# Altium PCB PCBVerstuur.pcbdoc (part 1 of 2)
Units mil, origin at the board's own origin, x right, y up, seen from the top; angles counter-clockwise.
Board outline 6000 x 4000 mil, 2 copper layers (Top Layer, Bottom Layer); 76 components, 71 nets, 294 pads, 53 vias.
Unrouted connection lines stored in the file: 2.
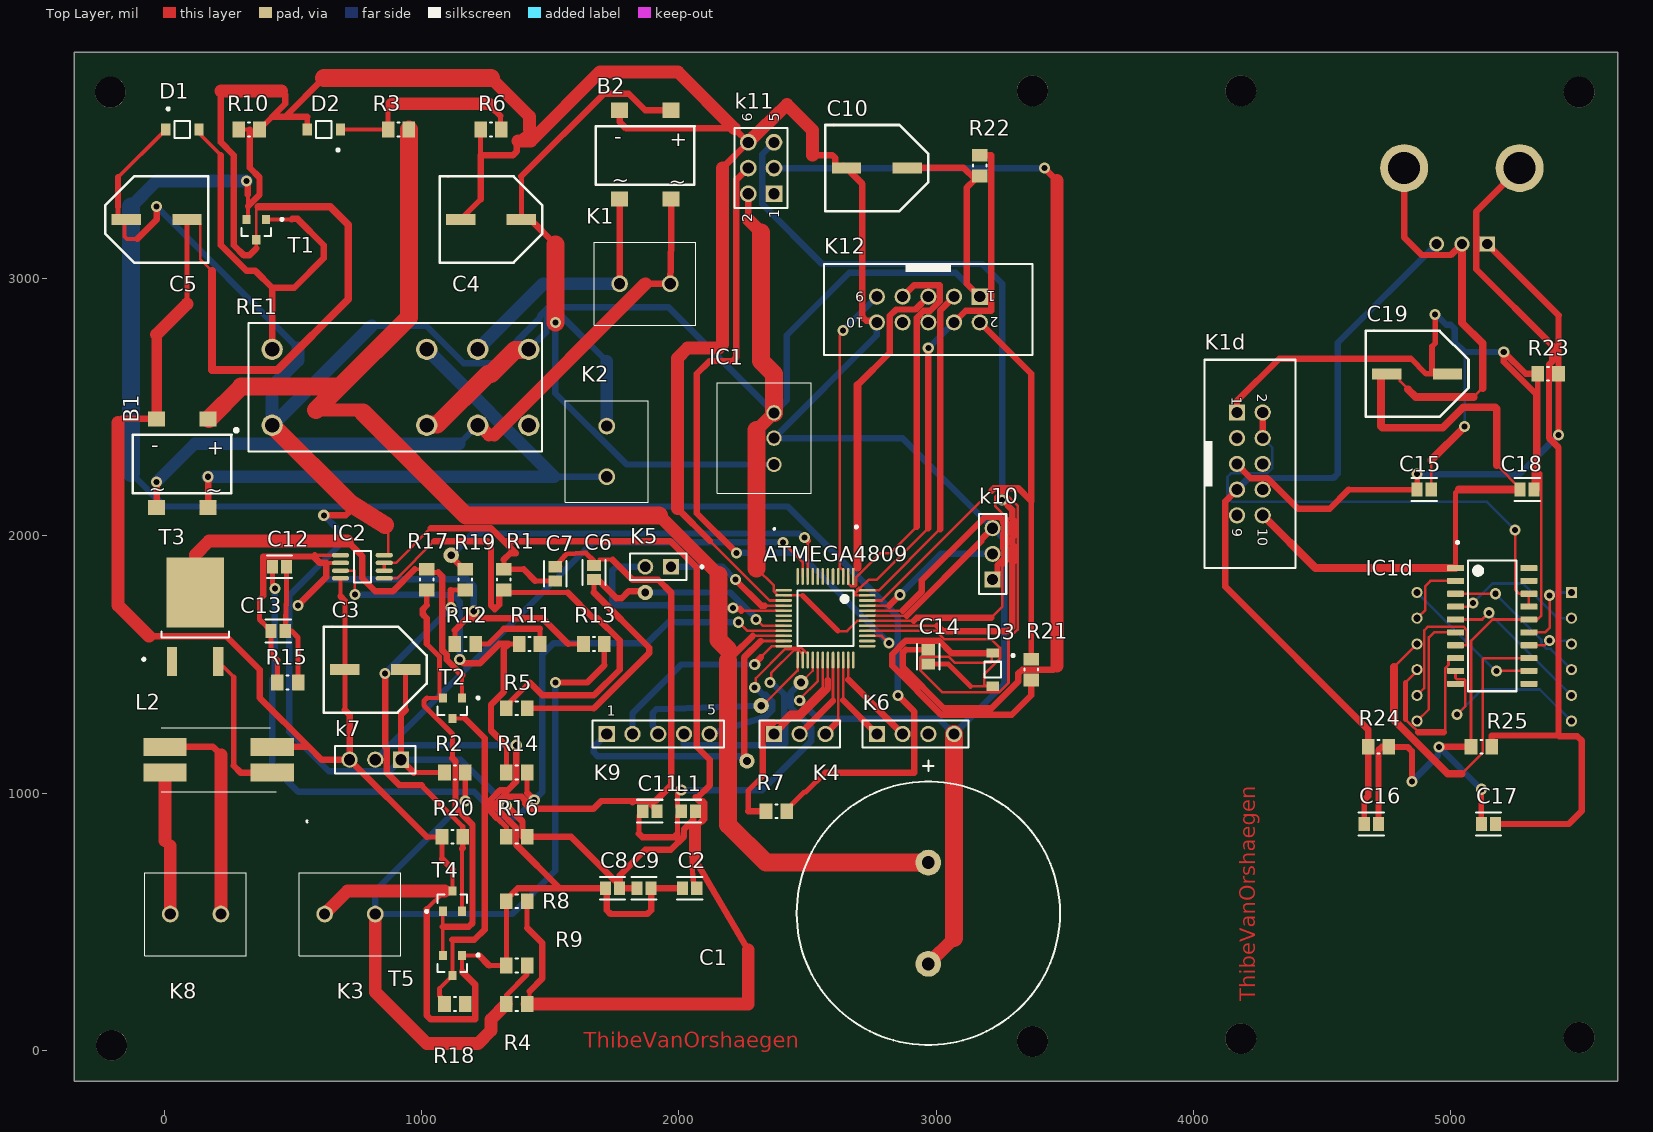
[diagram p0: Top Layer view]
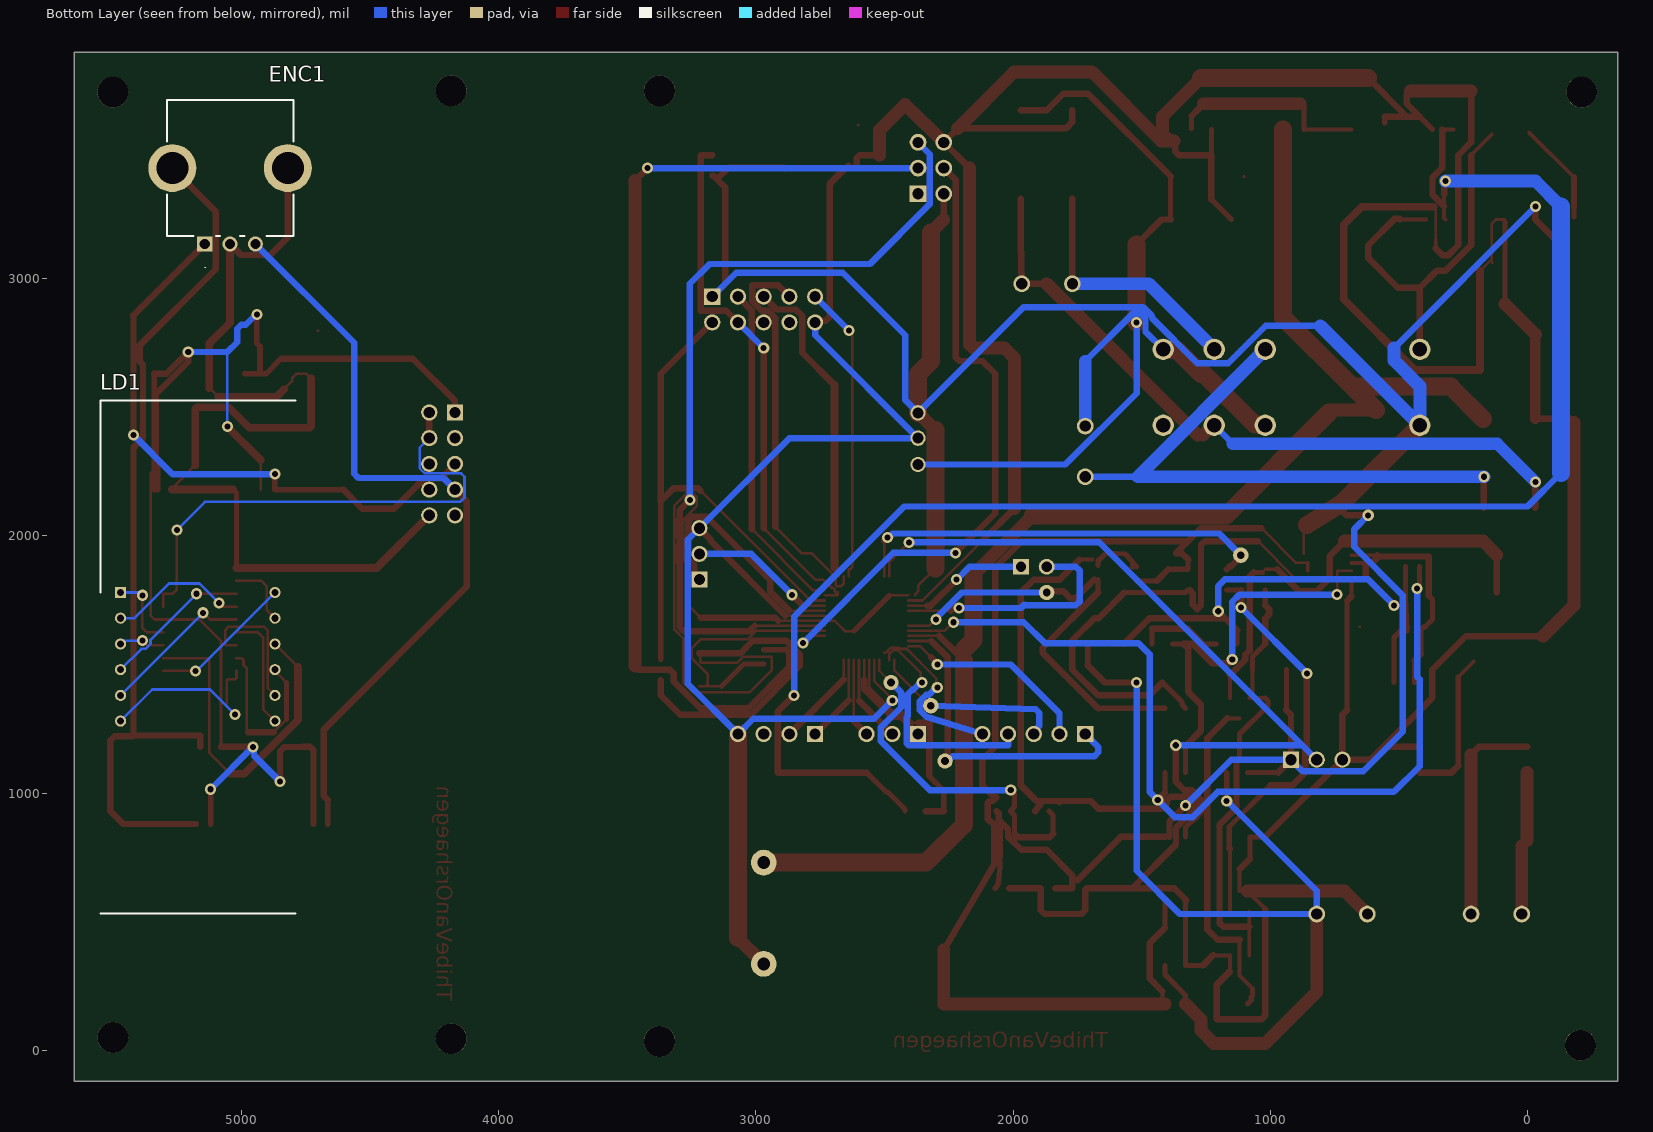
[diagram p1: Bottom Layer view, seen from below]

## Layer stack, top to bottom
Top Solder: solder mask 0.4, Solder Resist, Dk 3.5
Top Layer: signal copper 1.4
Dielectric 1: dielectric 12.6, FR-4, Dk 4.8
Bottom Layer: signal copper 1.4
Bottom Solder: solder mask 0.4, Solder Resist, Dk 3.5

## Board outline
-350,-120 5650,-120 5650,3880 -350,3880

## Design rules (kind name [scope] priority, off if disabled: settings)
Clearance [All] p1: gap=0.25 ignorepadtopadclearanceinfootprint=FALSE
HoleSize [All] p1: absolutevalues=TRUE maxlimit=130 minlimit=1 maxpercent=80.000 minpercent=20.000
MinimumSolderMaskSliver [All] p1: minsoldermaskwidth=5
PolygonConnect [All] p1: connectstyle=Relief reliefconductorwidth=10 reliefentries=4 polygonreliefangle="90 Angle" airgapwidth=10
RoomDefinition Voeding [InComponentClass('Voeding')] p1: confinementstyle=ConfineOut formatcopy=TRUE lockcomponents=FALSE outline -1350,-1120 650,-1120 650,-120 -1350,-120
RoomDefinition Thermokoppel [InComponentClass('Thermokoppel')] p2: confinementstyle=ConfineOut formatcopy=TRUE lockcomponents=FALSE outline -1350,-1120 650,-1120 650,-120 -1350,-120
RoomDefinition PWM_Soldeerbout [InComponentClass('PWM_Soldeerbout')] p3: confinementstyle=ConfineOut formatcopy=TRUE lockcomponents=FALSE outline -1350,-1120 650,-1120 650,-120 -1350,-120
RoomDefinition Display [InComponentClass('Display')] p4: confinementstyle=ConfineOut formatcopy=TRUE lockcomponents=FALSE outline -1350,-1120 650,-1120 650,-120 -1350,-120
RoomDefinition CPU_microcontroler [InComponentClass('CPU_microcontroler')] p5: confinementstyle=ConfineOut formatcopy=TRUE lockcomponents=FALSE outline -1350,-1120 650,-1120 650,-120 -1350,-120
RoutingVias [All] p1: holewidth=23.62 width=43.31 viastyle="Through Hole" minholewidth=23.62 minwidth=43.31 maxholewidth=23.62 maxwidth=43.31
SilkToSolderMaskClearance [IsPad] p1: minsilkscreentomaskgap=0 clearancetoexposedcopper=TRUE
SolderMaskExpansion [All] p1: expansion=4 istentingtop=FALSE
Width [All] p1: maxlimit=70 minlimit=10 preferedwidth=10 minimp=50.000000 maximp=50.000000 favimp=50.000000
27 further rules are at their usual default settings.

## Classes and differential pairs
component class Voeding: B1 B2 C1 C4 C5 D1 D2 IC1 K1 K2 R3 R6 R7 R10 RE1 T1
component class Thermokoppel: C2 C3 C6 C7 C12 C13 IC2 K3 R1 R2 R4 R5 R8 R9 R11 R12 R13 R14 R15
component class PWM_Soldeerbout: K8 L2 R17 R18 R19 R20 T2 T3 T4 T5
component class Display: C15 C16 C17 C18 C19 ENC1 IC1d K1d LD1 R23 R24 R25
component class CPU_microcontroler: ATMEGA4809 C8 C9 C10 C11 C14 D3 K4 K5 K6 k7 K9 k10 k11 K12 L1 R16 R21 R22

## Components (designator, comment, footprint, x,y, rotation, side; value= is the part's Value field where it differs from the comment)
ATMEGA4809 "ATMEGA4809" TQFP_48_M 2570,1680 r270 top
B1 "D6KB6U" TTF 70,2280 r0 top
B2 "D6KB6U" TTF 1870,3480 r0 top
C1 "4700µ 50v" CE_D25_L25_PLUGIN 2970,336.3 r90 top
C2 "10µ 50v" CC_0805_M 2042.41,630 r180 top value="0.22 μF"
C3 "100n" CE_D8_L10 820,1480 r0 top
C4 "100µ 25V" CE_D8_L10 1270,3230 r0 top
C5 "10µ 50V" CE_D8_L10 -30,3230 r180 top
C6 "10n" CC_0805_M 1670,1857.59 r90 top value="0.22 μF"
C7 "10n" CC_0805_M 1520,1852.41 r90 top value="0.22 μF"
C8 "100nf" CC_0805_M 1742.41,630 r180 top value="0.22 μF"
C9 "100nf" CC_0805_M 1864.82,630 r0 top value="0.22 μF"
C10 "10µf" CE_D8_L10 2770,3430 r0 top
C11 "100nf" CC_0805_M 1887.23,930 r0 top value="0.22 μF"
C12 "10n" CC_0805_M 447.59,1880 r0 top value="0.22 μF"
C13 "10n" CC_0805_M 442.41,1630 r0 top value="0.22 μF"
C14 "100n" CC_0805_M 2970,1530 r90 top value="0.22 μF"
C15 "10n" CC_0805_M 4897.59,2180 r180 top value="0.22 μF"
C16 "10n" CC_0805_M 4692.41,880 r180 top value="0.22 μF"
C17 "10n" CC_0805_M 5147.59,880 r0 top value="0.22 μF"
C18 "100n" CC_0805_M 5297.59,2180 r180 top value="0.22 μF"
C19 "100µ" CE_D8_L10 4870,2630 r0 top
D1 "1N4007" SOD-123FL 70,3580 r0 top value=15pF
D2 "5v1" SOD-123FL 620,3580 r180 top
D3 "Diode" SOD-123FL 3220,1480 r270 top value=15pF
ENC1 "ROTARY_ENCODER" PEC11R4225FN0024 5142.83,3134.72 r180 bottom
IC1 "OKI-78SR-5/1.5-W36-C" OKI78SR515W36C 2370,2277.64 r90 top
IC1d "TM1637" SOP_20_M 5162.28,1650 r0 top
IC2 "" MSOP_8_M 770,1880 r180 top
K1 "282836-2" "SCHROEFCONNECTOR 2 PIN" 1770,2980 r180 top
K1d "61201021621" "BOX HEADER 10-PIN" 4220,2280 r270 top
K2 "282836-2" "SCHROEFCONNECTOR 2 PIN" 1720,2426.85 r90 top
K3 "282836-2" "SCHROEFCONNECTOR 2 PIN" 820,530 r0 top
K4 "61300311121" "PIN HEADER 1X3" 2470,1230 r0 top
K5 "M20-9990246" "PIN HEADER 1X2" 1920,1880 r180 top
K6 "61300411121" "PIN HEADER 1X4" 2920,1230 r0 top
k7 "61300311121" "PIN HEADER 1X3" 820,1130 r180 top
K8 "" "SCHROEFCONNECTOR 2 PIN" 220,530 r0 top
K9 "61300511121" "PIN HEADER 1X5" 1920,1230 r0 top
k10 "61300311121" "PIN HEADER 1X3" 3220,1930 r90 top
k11 "61300621121" "PIN HEADER 2X6" 2320,3430 r90 top
K12 "" "BOX HEADER 10-PIN" 2970,2880 r180 top
L1 "Choke" CC_0805_M 2037.23,930 r0 top
L2 "" 2545 211.14,1130 r90 top
LD1 "7 Sigment" DIPS1524W51P254L5040H825Q12N 5470,1780 r180 bottom
R1 "18k" RESC2013X50X30ML20T20 1320,1830 r90 top
R2 "1M" RESC2013X50X30ML20T20 1129.65,1080 r180 top
R3 "68k" RESC2013X50X30ML20T20 910.35,3580 r0 top
R4 "5K6" RESC2013X50X30ML20T20 1370,180 r180 top
R5 "5K6" RESC2013X50X30ML20T20 1370,1330 r180 top
R6 "10k" RESC2013X50X30ML20T20 1270,3580 r0 top
R7 "10k" RESC2013X50X30ML20T20 2379.65,930 r0 top
R8 "1k" RESC2013X50X30ML20T20 1370,580 r0 top
R9 "10M" RESC2013X50X30ML20T20 1370,330 r0 top
R10 "4k7" RESC2013X50X30ML20T20 329.65,3580 r180 top
R11 "18k" RESC2013X50X30ML20T20 1420,1580 r0 top
R12 "18k" RESC2013X50X30ML20T20 1170,1580 r180 top
R13 "5K6" RESC2013X50X30ML20T20 1670,1580 r0 top
R14 "5K6" RESC2013X50X30ML20T20 1370,1080 r180 top
R15 "100" RESC2013X50X30ML20T20 479.65,1430 r180 top
R16 "47k" RESC2013X50X30ML20T20 1370,830 r180 top
R17 "4K7" RESC2013X50X30ML20T20 1020,1830 r90 top
R18 "100" RESC2013X50X30ML20T20 1129.65,180 r0 top
R19 "10k" RESC2013X50X30ML20T20 1170,1830 r270 top
R20 "4K7" RESC2013X50X30ML20T20 1120,830 r0 top
R21 "47k" RESC2013X50X30ML20T20 3370,1480 r90 top
R22 "47k" RESC2013X50X30ML20T20 3170,3439.65 r90 top
R23 "10k" RESC2013X50X30ML20T20 5379.65,2630 r180 top
R24 "10k" RESC2013X50X30ML20T20 4720,1180 r0 top
R25 "10k" RESC2013X50X30ML20T20 5120,1180 r180 top
RE1 "" RT42 419.21,2577.64 r0 top
T1 "BC547" SOT_23 357.4,3190.63 r270 top
T2 "BC547" SOT_23 1120,1330 r270 top
T3 "IRF9Z34NPBF" TO_252 120,1685.51 r90 top
T4 "BC547" SOT_23 1120,580 r90 top
T5 "BC557" SOT_23 1120,330 r270 top

## Footprints (in the part's own frame and the unit in brackets; to place one, negate y for a bottom-side part, rotate by r counter-clockwise, add the part's x,y. Pads: shape width x height; smd on the part's side, far side on the other; paste and mask are expansions set on the pad)
2545 [mm]
  rect 1.78x4.27 smd: 1(-1.27,-5.305) 2(1.27,-5.305) 3(1.27,5.305) 4(-1.27,5.305)
  silkscreen extent -6.2,-8.76 3.15,5.69, body extent -3.15,-7.26 3.15,7.26, height 9.6
"BOX HEADER 10-PIN" [mm] "10 pins, straight, gold plating"
  rect 1.6x1.6 hole 1.1: 1(-5.08,-1.27)
  round 1.6 hole 1.1: 2(-5.08,1.27) 3(-2.54,-1.27) 4(-2.54,1.27) 5(0,-1.27) 6(0,1.27) 7(2.54,-1.27) 8(2.54,1.27) 9(5.08,-1.27) 10(5.08,1.27)
  silkscreen extent -10.28,-4.5 10.28,4.5, body extent -10.18,-4.42 10.18,4.75, height 9.13
CC_0805_M [mil]
  rect 43.49x53.39 smd paste+0 mask+0: 1(-27.59,0) 2(27.59,0)
  silkscreen extent -49,-44 49,44, body extent -53,-32 53,32, height 10
CE_D8_L10 [mm]
  rect 2.9x1.1 smd: 1(-3,0) 2(3,0)
  Top Layer lines w0.254: -4.259,4.25 -4.25,4.241
  silkscreen extent -5.08,-4.25 5.08,4.25
CE_D25_L25_PLUGIN [mm]
  round 2.54 hole 1.27: 1(0,0) 2(10,0)
  silkscreen extent -8,-13 20.07,13
DIPS1524W51P254L5040H825Q12N [mm]
  rect 1.1x1.1 hole 0.7: 1(0,0)
  round 1.1 hole 0.7: 2(0,-2.54) 3(0,-5.08) 4(0,-7.62) 5(0,-10.16) 6(0,-12.7) 7(15.24,-12.7) 8(15.24,-10.16) 9(15.24,-7.62) 10(15.24,-5.08) 11(15.24,-2.54) 12(15.24,0)
  silkscreen extent -2.01,-31.68 17.24,18.98
MSOP_8_M [mil] "TSOP, 8-Leads, Body 3x3mm, Pitch 0.65mm, IPC Medium Density"
  oval 66.93x17.72 smd: 1(-85,45) 2(-85,15) 3(-85,-15) 4(-85,-45) 5(85,-45) 6(85,-15) 7(85,15) 8(85,45)
  silkscreen extent -33,-61 33,61, body extent -61,-61 61,61, height 43
OKI78SR515W36C [mm]
  round 1.519 hole 1.08: 1(0,0) 2(2.6,0) 3(5.1,0)
  silkscreen extent -6.4,-3.7 8.05,5.6, body extent -2.85,-3.7 8.05,5.6, height 16.6
PEC11R4225FN0024 [mm]
  round 4.74 hole 3.16: 1(-3.2,7.5) 2(8.2,7.5)
  rect 1.5x1.5 hole 1: A(0,0)
  round 1.5 hole 1: B(5,0) C(2.5,0)
  silkscreen extent -3.75,-2.34 8.75,14.2, body extent -4.68,-0.4 9.68,14.2, height 31.6
"PIN HEADER 1X2" [mm]
  rect 1.57x1.57 hole 1.02 paste-1000 mask+0: 1(-1.27,0)
  round 1.57 hole 1.02 paste-1000 mask+0: 2(1.27,0)
  silkscreen extent -4.44,-1.32 2.79,1.32, body extent -2.89,-1.42 2.89,1.42, height 0.25
"PIN HEADER 1X3" [mm] "Pin Header, pitch 2.54 mm, THT, Vertical, single row, 3p"
  rect 1.6x1.6 hole 1.1: 1(-2.54,0)
  round 1.6 hole 1.1: 2(0,0) 3(2.54,0)
  silkscreen extent -3.96,-1.34 3.96,1.34, body extent -3.81,-1.27 3.81,1.27, height 8.57
"PIN HEADER 1X4" [mm] "Pin Header, pitch 2.54 mm, THT, Vertical, single row, 4p"
  rect 1.6x1.6 hole 1.1: 1(-3.81,0)
  round 1.6 hole 1.1: 2(-1.27,0) 3(1.27,0) 4(3.81,0)
  silkscreen extent -5.23,-1.34 5.23,1.34, body extent -5.08,-1.27 5.08,1.27, height 8.57
"PIN HEADER 1X5" [mm] "Pin Header, pitch 2.54 mm, THT, Vertical, single row, 5p"
  rect 1.6x1.6 hole 1.1: 1(-5.08,0)
  round 1.6 hole 1.1: 2(-2.54,0) 3(0,0) 4(2.54,0) 5(5.08,0)
  silkscreen extent -6.5,-1.34 6.5,1.34, body extent -6.35,-1.27 6.35,1.27, height 8.57
"PIN HEADER 2X6" [mm] "Pin Header, pitch 2.54 mm, THT, Vertical, dual row, 6p"
  rect 1.65x1.65 hole 1.1: 1(-2.54,-1.27)
  round 1.65 hole 1.1: 2(-2.54,1.27) 3(0,-1.27) 4(0,1.27) 5(2.54,-1.27) 6(2.54,1.27)
  silkscreen extent -3.96,-2.61 3.96,2.61, body extent -3.81,-2.54 3.81,2.54, height 8.59
RESC2013X50X30ML20T20 [mm] "Chip Resistor, 2-Leads, Body 2.00x1.25mm, IPC Low Density"
  rect 1.25x1.55 smd: 1(-1.025,0) 2(1.025,0)
  silkscreen extent -0.1,-0.67 0.1,0.67, body extent -1.1,-0.72 1.1,0.72, height 0.5
RT42 [mm]
  round 2.1 hole 1.4: 11(20.3,-3.75) 12(15.26,-3.75) 14(25.34,-3.75) 21(20.3,3.75) 22(15.26,3.75) 24(25.34,3.75) A1(0,-3.75) A2(0,3.75)
  silkscreen extent -3.67,-6.35 26.65,6.35, body extent -2.21,-6.35 26.79,6.35, height 15.86
"SCHROEFCONNECTOR 2 PIN" [mm]
  round 1.65 hole 1.1: 1(0,0) 2(-5,0)
  silkscreen extent -7.5,-4.1 2.5,4.1, body extent -8.09,-4.1 2.51,4.1, height 10.02
SOD-123FL [mm] "SOD, 2-Leads, Body 2.7x1.65mm"
  rect 0.91x1.22 smd: 1(-1.635,0) 2(1.635,0)
  silkscreen extent -1.52,-0.82 0.78,2.16, body extent -1.35,-0.82 1.35,0.82, height 1
SOP_20_M [mm] "SOIC,20-Leads,Body 12.9x5.6mm,Pitch 1.27mm,IPC Medium Density"
  rrect17% 1.65x0.6 smd: 1(-3.625,5.715) 2(-3.625,4.445) 3(-3.625,3.175) 4(-3.625,1.905) 5(-3.625,0.635) 6(-3.625,-0.635) 7(-3.625,-1.905) 8(-3.625,-3.175) 9(-3.625,-4.445) 10(-3.625,-5.715) 11(3.625,-5.715) 12(3.625,-4.445) 13(3.625,-3.175) 14(3.625,-1.905) 15(3.625,-0.635) 16(3.625,0.635) 17(3.625,1.905) 18(3.625,3.175) 19(3.625,4.445) 20(3.625,5.715)
  silkscreen extent -3.55,-6.45 2.4,8.38, body extent -2.8,-6.45 2.8,6.45, height 2
SOT_23 [mm] "SOT23, 3-Leads, Body 2.92x1.3mm, Pitch 0.95mm"
  rect 0.9x0.8 smd: 1(-1,0.95) 2(-1,-0.95) 3(1,0)
  silkscreen extent -1.14,-1.46 0.65,2.67, body extent -0.65,-1.46 0.65,1.46, height 1.11
TO_252 [mm] "DPAK, 3-Leads, Body 6.5x6.12mm, Pitch 2.28mm, IPC Low Density"
  rect 2.85x1 smd: 1(-4.4,2.28) 3(-4.4,-2.28)
  rect 6.9x5.65 smd: 2(2.4,0)
  silkscreen extent -4.32,-3.35 -1.45,5.2, body extent -2.05,-3.32 4.17,3.32, height 2.35
TQFP_48_M [mm]
  rect 1.655x0.252 smd paste+0 mask+0: 1(-4.125,2.75)
  rrect100% 1.655x0.252 smd paste+0 mask+0: 2(-4.125,2.25) 3(-4.125,1.75) 4(-4.125,1.25) 5(-4.125,0.75) 6(-4.125,0.25) 7(-4.125,-0.25) 8(-4.125,-0.75) 9(-4.125,-1.25) 10(-4.125,-1.75) 11(-4.125,-2.25) 12(-4.125,-2.75) 25(4.125,-2.75) 26(4.125,-2.25) 27(4.125,-1.75) 28(4.125,-1.25) 29(4.125,-0.75) 30(4.125,-0.25) 31(4.125,0.25) 32(4.125,0.75) 33(4.125,1.25) 34(4.125,1.75) 35(4.125,2.25) 36(4.125,2.75)
  rrect100% 0.252x1.655 smd paste+0 mask+0: 13(-2.75,-4.125) 14(-2.25,-4.125) 15(-1.75,-4.125) 16(-1.25,-4.125) 17(-0.75,-4.125) 18(-0.25,-4.125) 19(0.25,-4.125) 20(0.75,-4.125) 21(1.25,-4.125) 22(1.75,-4.125) 23(2.25,-4.125) 24(2.75,-4.125) 37(2.75,4.125) 38(2.25,4.125) 39(1.75,4.125) 40(1.25,4.125) 41(0.75,4.125) 42(0.25,4.125) 43(-0.25,4.125) 44(-0.75,4.125) 45(-1.25,4.125) 46(-1.75,4.125) 47(-2.25,4.125) 48(-2.75,4.125)
  silkscreen extent -9.14,-2.75 2.75,3.17, body extent -5.2,-5.2 5.2,5.2, height 0.25
TTF [mm]
  rect 1.7x1.5 smd: 1(2.54,4.445) 2(-2.54,4.445) 3(-2.54,-4.318) 4(2.54,-4.318)
  silkscreen extent -4.91,-2.92 4.86,2.88

## Part data
ATMEGA4809: Case/Package=TQFP, Max Operating Temperature=85°C, Min Operating Temperature=-40°C, Core Architecture=AVR, Interface=I2C, Memory Size=48KB, Memory Type=FLASH, Mount="Surface Mount", Number of I/Os=41, Oscillator Type=Internal, Peripherals="Brown-out Detect/Reset", RoHS Compliant=Yes, Series="megaAVR® 0, Functional Safety (FuSa)"
B1 B2: library part Bridge_Rectifier, Average Rectified Current-Max=0.8A, Forward Voltage=1V, Manufacturer="Diodes Inc", Package Description="4-Pin Small Outline Integrated Circuit, Body 4.7 x 3.8 mm, Pitch 2.5 mm", Package Reference=MiniDIP-4, Package Version=05/2016, Peak Current-Max=30A, Reverse Current-Max=5µA, Reverse Voltage-Max [Vrrm]=600V, Datasheet URL=http://www.diodes.com/_files/datasheets/ds17003.pdf, Datasheet Version="Rev. 13-2, 12/2010", Manufacturer URL=http://www.diodes.com/, Mounting Technology=SurfaceMount, Package URL=http://www.diodes.com/_files/packages/MiniDIP.pdf
C1 C3 C4 C5 C10 C19: library part Capacitor_Electrolytic, Manufacturer=Panasonic, Max Operating Temperature="105 degC", Min Operating Temperature="-55 degC", Package Quantity=500, Voltage Rating="25 V", ComponentLink1Description="Manufacturer URL", ComponentLink1URL=http://www.panasonic.com/, ComponentLink2Description=Datasheet, ComponentLink2URL=http://industrial.panasonic.com/cdbs/www-data/pdf/RDE0000/ABA0000C1181.pdf, DatasheetVersion=03/2016, Height="10.2 mm", Lead Pitch="3.1 mm", Length="10.2 mm", Mount="Surface Mount", Mounting Technology="Surface Mount", PackageDescription="2-Pin Electrolytic Aluminum Capacitor, Body 8.3 x 8.3 mm", PackageReference=EEE-FK1E221P, Packaging="Tape and Reel", Pins=2, REACH SVHC="No SVHC", RoHSCompliant=true
C2 C6 C7 C8 C9 C11 C12 C13 C14 C15 C16 C17 C18: library part Capacitor_Ceramic, Capacitance="0.22 μF", Manufacturer=KEMET, Manufacturer Part Number=C0805C224K5RACTU, Package=C0805C-DN, Temperature="-55°C to +125°C", Temperature Characteristic=X7R, Temperature Coefficient=30ppm/°C, Temperature Range High=+125°C, Temperature Range Low=-55°C, Tolerance=0.1, Voltage Rating="50 V", Automotive=No, Category=Cap, ComponentLink2Description=Datasheet, ComponentLink2URL=https://content.kemet.com/datasheets/KEM_C1003_C0G_SMD.pdf, Device Class L1="Passive Components", Device Class L2=Capacitors, Device Class L3="Ceramic Capacitors", Digikey Description="CAP CER 0.22UF 50V X7R 0805", Height=0.88mm, Ipc Land Pattern Name=CAPC200125X78, Lead Free=Yes, Material=Ceramic, Mouser Description="CAP CER 0.22UF 50V X7R 0805", Octopart=https://octopart.com/c0805c224k5ractu-kemet-144670, RoHS=TRUE
D1: library part Diode, Capacitance=15pF, Forward Current=1A, Manufacturer=Diotec, Max Junction Temp=+175°C, Max Repetitive Reverse Voltage=1000V, Max Surge Forward Current=27A, Peak Reverse Current=5uA, Temperature="-50°C to +175°C", Temperature Range Low=-50°C, Automotive=No, Category=Diode, ComponentLink2Description=Datasheet, ComponentLink2URL=https://datasheet.octopart.com/1N4007-Diotec-datasheet-62346875.pdf, Device Class L1="Discrete Semiconductors", Device Class L2=Diodes, Device Class L3="Rectifier Diodes", Height=2.8mm, Ipc Land Pattern Name=DIOAD888W100L520D280, Lead Free=Yes, Manufacturer Part Number=1N4007, Octopart=https://octopart.com/1n4007-diotec-4040411, Package=1N4007, Reverse Voltage=1000V, RoHS=TRUE, Temperature Range High=+175°C
D2: library part Zener_Diode, Manufacturer="On Semiconductor", PartNumber=1SMB5920BT3G, ComponentLink1Description="Manufacturer URL", ComponentLink1URL=http://www.onsemi.com/, ComponentLink2Description=Datasheet, ComponentLink2URL=http://www.onsemi.com/pub_link/Collateral/1SMB5913BT3-D.PDF, ComponentLink3Description="Package Specification", ComponentLink3URL=http://www.onsemi.com/pub_link/Collateral/1SMB5913BT3-D.PDF, DatasheetVersion="Rev. 8", Mounting Technology="Surface Mount", PackageDescription="2-Pin Small Molded Package, J-Bend Lead, Body 4.33 x 3.625 mm", PackageReference=SMB-2-403A-03_H, PackageVersion="Rev. H, 05/2011", Packing="Tape and Reel", RoHS=Pb-Free, VZ Typ (V)=6.2
D3: Capacitance=15pF, Forward Current=1A, Manufacturer=Diotec, Manufacturer Part Number=1N4007, Max Junction Temp=+175°C, Max Repetitive Reverse Voltage=1000V, Max Surge Forward Current=27A, Peak Reverse Current=5uA, Temperature="-50°C to +175°C", Temperature Range Low=-50°C, Automotive=No, Category=Diode, ComponentLink2Description=Datasheet, ComponentLink2URL=https://datasheet.octopart.com/1N4007-Diotec-datasheet-62346875.pdf, Device Class L1="Discrete Semiconductors", Device Class L2=Diodes, Device Class L3="Rectifier Diodes", Height=2.8mm, Ipc Land Pattern Name=DIOAD888W100L520D280, Lead Free=Yes, Octopart=https://octopart.com/1n4007-diotec-4040411, Package=1N4007, Reverse Voltage=1000V, RoHS=TRUE, Temperature Range High=+175°C
ENC1: Current Rating=10mA, Manufacturer=Bourns, Manufacturer Part Number=PEC11R-4015F-N0024, Package=0, Temperature="-30°C to +70°C", Temperature Range High=+70°C, Temperature Range Low=-30°C, Voltage Rating Dc=5V, Automotive=No, Category=Enc, ComponentLink2Description=Datasheet, ComponentLink2URL=https://www.bourns.com/docs/product-datasheets/pec11r.pdf?sfvrsn=bb617cbf_7, Conn Orientation=Vertical, Detent=No, Device Class L1=Electromechanical, Device Class L2=Switches, Device Class L3=Encoders, Digikey Description="ROTARY ENCODER MECHANICAL 24PPR", Encoder Type=Incremental, Height=22.3mm, Lead Free=Yes, Mouser Description="Encoders 15mm SHAFT NO SWITCH", Number Of Circuits=1, Octopart=https://octopart.com/pec11r-4015f-n0024-bourns-26648251, Pulses Per Rev=24, RoHS=TRUE
IC1: library part "DC/DC Converter", Current - Output (Max)=1.5A, Manufacturer=Murata, Operating Temperature=-40degC~85degC, Package / Case=3-SIPModule, Power (Watts) - Manufacture Series=8W, Voltage - Input (Max)=36V, Voltage - Input (Min)=7V, Voltage - Isolation=-, Voltage - Output 1=5V, Applications=ITE(Commercial), Category=PowerSupplies-BoardMount, Datasheet URL=https://datasheet.ciiva.com/8006/1790439-8006672.pdf, Datasheet Version=Oct-13, Efficiency=90.5%, Family=DCDCConverters, Features=SCP, Manufacturer URL=http://www.murata.com/, Mounting Type=ThroughHole, Number of Outputs=1, Packaging=Tube, Power (Watts) - Max=8W, Series=Okami™OKI-78SR, Size / Dimension="0.41\"Lx0.30\"Wx0.65\"H(10.4mmx7.6mmx16.5mm)", Type=LinearRegulatorReplacement, Voltage - Output 2=-, Voltage - Output 3=-
IC1d: "LED Drive Control Special Circuit", Package=Package, Availability="Not in stock", Check_prices=https://www.snapeda.com/parts/TM1637/Titan+Micro+Electronics/view-part/?ref=eda, MF="Titan Micro Electronics", MP=TM1637, Price=None, SnapEDA_Link=https://www.snapeda.com/parts/TM1637/Titan+Micro+Electronics/view-part/?ref=snap
IC2: library part Dual_Opamp, Case/Package=PDIP, Input Bias Current=1pA, Input Offset Voltage (Vos)=4.5mV, Max Operating Temperature=125°C, Max Supply Voltage=6V, Min Operating Temperature=-40°C, Min Supply Voltage=1.8V, Nominal Supply Current=100uA, Operating Supply Voltage=5.5V, Output Current=23mA, Package Quantity=60, Power Supply Rejection Ratio (PSRR)=86dB, Voltage Gain=112dB, Amplifier Type="GENERAL PURPOSE", Bandwidth=1MHz, Common Mode Rejection Ratio=60dB, Gain Bandwidth Product=1MHz, Height=3.3mm, Input Offset Voltage-Max=4.5mV, Lead Free="Lead Free", Length=9.27mm, Mount="Through Hole", Number of Amplifiers=2, Number of Channels=2, Number Of Circuits=2, Number of Elements=2, Number of Pins=8, Operating Supply Current=100uA, Output Current per Channel=23mA, Packaging=Rail/Tube, Radiation Hardening=No, REACH SVHC="No SVHC", RoHS Compliant=Yes, Slew Rate=0.6V/µs, Slew Rate-Nom=0.6V/µs, Supply Current=100uA, Technology=CMOS, Unity Gain Bandwidth Product=1MHz, Width=6.35mm
K1 K2 K3: library part "Schroefconnector 2 Pin L", "Connector", Manufacturer_Name="TE Connectivity", Datasheet Link=https://www.te.com/commerce/DocumentDelivery/DDEController?Action=showdoc&DocId=Customer+Drawing%7F282836%7FJ%7Fpdf%7FEnglish%7FENG_CD_282836_J.pdf%7F282836-2, Height=10mm, Manufacturer_Part_Number=282836-2
K1d: library part "Box Header", "Male Box Header WR-BHD, THT, Vertical, pitch 2.54 mm, 10 pins", Contact Resistance=20mOhm, Manufacturer="Wurth Elektronik", Operating Temperature=-40to125degC, Withstanding Voltage=500VAC, Working Voltage=250VAC, Datasheet URL=https://katalog.we-online.de/em/datasheet/6120xx21621.pdf, Gender=Male, Manufacturer URL=http://www.we-online.de, Mounting Technology=THT, Orientation=Vertical, Package Reference=61201021621, Packaging=Tray, Part Number=61201021621, Pin Number=10, Pitch=2.54mm, Published Date=August2018, Publisher=WurthElektronik
K4 k7 k10: library part "pin header 1x3pin", "THT Vertical Pin Header WR-PHD, Pitch 2.54 mm, Single Row, 3 pins", Contact Resistance=20mOhm, Manufacturer="Wurth Elektronik", Operating Temperature=-40to105degC, Rated Current=3A, Withstanding Voltage=500VAC, Working Voltage=250VAC, Datasheet URL=https://katalog.we-online.de/em/datasheet/6130xx11121.pdf, Gender=Male, Manufacturer URL=http://www.we-online.de, Mounting Technology=THT, Orientation=Vertical, Package Reference=61300311121, Packaging=Bag, Part Number=61300311121, Pin Number=3, Pitch=2.54mm, Publisher=WurthElektronik, Row Number=Single
K5: library part "pin header 1x2", "CONN HEADER VERT 2POS 2.54MM", Current Rating=3A, Manufacturer=Harwin, Temperature="-40°C to +105°C", Temperature Range High=+105°C, Temperature Range Low=-40°C, Automotive=No, Category=Conn, ComponentLink2Description=Datasheet, ComponentLink2URL=https://cdn.harwin.com/pdfs/M20-999.pdf, Conn Gender=Male, Conn Orientation=Vertical, Contact Material=Tin,Nickel, Device Class L1=Connectors, Device Class L2="Headers and Wire Housings", Device Class L3=unset, Digikey Description="CONN HEADER VERT 2POS 2.54MM", Height=8.99mm, Lead Free=Yes, Manufacturer Part Number=M20-9990246, Mouser Description="2.54mm (0.1\") Pitch SIL Vertical PC Tail Pin Header, 6.1mm mating pin height, tin, 2 contacts", Number Of Contacts=2, Number Of Rows=1, Octopart=https://octopart.com/m20-9990246-harwin-2590635, Package=M20-9990246, Pitch=2.54mm, RoHS=TRUE
K6: library part "pin header 1x4", "THT Vertical Pin Header WR-PHD, Pitch 2.54 mm, Single Row, 4 pins", Contact Resistance=20mOhm, Manufacturer="Wurth Elektronik", Operating Temperature=-40to105degC, Rated Current=3A, Withstanding Voltage=500VAC, Working Voltage=250VAC, Datasheet URL=https://katalog.we-online.de/em/datasheet/6130xx11121.pdf, Gender=Male, Manufacturer URL=http://www.we-online.de, Mounting Technology=THT, Orientation=Vertical, Package Reference=61300411121, Packaging=Bag, Part Number=61300411121, Pin Number=4, Pitch=2.54mm, Publisher=WurthElektronik, Row Number=Single
K8: library part "Schroefconnector 2 Pin L", "Connector", Manufacturer_Name="TE Connectivity", Manufacturer_Part_Number=282836-2, Datasheet Link=https://www.te.com/commerce/DocumentDelivery/DDEController?Action=showdoc&DocId=Customer+Drawing%7F282836%7FJ%7Fpdf%7FEnglish%7FENG_CD_282836_J.pdf%7F282836-2, Height=10mm
K9: library part "pin header 1x5", "THT Vertical Pin Header WR-PHD, Pitch 2.54 mm, Single Row, 5 pins", Contact Resistance=20mOhm, Manufacturer="Wurth Elektronik", Operating Temperature=-40to105degC, Rated Current=3A, Withstanding Voltage=500VAC, Working Voltage=250VAC, Datasheet URL=https://katalog.we-online.de/em/datasheet/6130xx11121.pdf, Gender=Male, Manufacturer URL=http://www.we-online.de, Mounting Technology=THT, Orientation=Vertical, Package Reference=61300511121, Packaging=Bag, Part Number=61300511121, Pin Number=5, Pitch=2.54mm, Publisher=WurthElektronik, Row Number=Single
k11: library part "pin header 2x6", "THT Vertical Pin Header WR-PHD, Pitch 2.54 mm, Dual Row, 6 pins", Contact Resistance=20mOhm, Manufacturer="Wurth Elektronik", Operating Temperature=-40to105degC, Rated Current=3A, Withstanding Voltage=500VAC, Working Voltage=250VAC, Datasheet URL=https://katalog.we-online.de/em/datasheet/6130xx21121.pdf, Gender=Male, Manufacturer URL=http://www.we-online.de, Mounting Technology=THT, Orientation=Vertical, Package Reference=61300621121, Packaging=Bag, Part Number=61300621121, Pin Number=6, Pitch=2.54mm, Publisher=WurthElektronik, Row Number=Dual
K12: library part "Box Header", "Male Box Header WR-BHD, THT, Vertical, pitch 2.54 mm, 10 pins", Contact Resistance=20mOhm, Manufacturer="Wurth Elektronik", Operating Temperature=-40to125degC, Package Reference=61201021621, Withstanding Voltage=500VAC, Working Voltage=250VAC, Datasheet URL=https://katalog.we-online.de/em/datasheet/6120xx21621.pdf, Gender=Male, Manufacturer URL=http://www.we-online.de, Mounting Technology=THT, Orientation=Vertical, Packaging=Tray, Part Number=61201021621, Pin Number=10, Pitch=2.54mm, Published Date=August2018, Publisher=WurthElektronik
L1: Case/Package=1350, Current Rating=8.5A, DC Resistance (DCR)=14.1mR, Inductance=10uH, Inductance Tolerance=20%, Max Operating Temperature=155°C, Min Operating Temperature=-40°C, Package Quantity=1, Ratings=AEC-Q200, Resistor Type=Wirewound, Saturation Current=10A, Self Resonant Frequency=18MHz, Series Resistance=14.1R, Test Frequency=100kHz, Height=4.7mm, Height - Seated (Max)=0.197inch, Length=0.512inch, Max DC Current=8.5A, Mount="Surface Mount", Packaging="Tape and Reel", RMS Current (Irms)=8.5A, RoHS Compliant=Yes, Series=WE-HCI, Shielding=Shielded, Termination=SMD/SMT, Tolerance=20%, Width=12.8mm
L2: library part Common_Mode_Choke, Case/Package=1808, Current=2A, Current Rating=2.3A, DC Resistance (DCR)=60mR, Insulation Resistance=10MR, Max Operating Temperature=85°C, Max Voltage Rating (DC)=50V, Min Operating Temperature=-40°C, Package Quantity=1, Test Frequency=100MHz, DC Current=2A, DC Resistance-Max=60mR, Depth=4.7mm, Element Configuration=Dual, Height=2mm, Impedance=900R, Lead Free="Lead Free", Length=0.185inch, Max Current Rating=2A, Max DC Current=2A, Mount="Surface Mount", Number of Lines=2, Number of Pins=4, Packaging="Tape and Reel", Radiation Hardening=No, REACH SVHC="No SVHC", RoHS Compliant=Yes, Series=ACM, Termination=Flat, Voltage Rating=50V, Voltage Rating (DC)=50V, Width=4.5mm
R1 R2 R3 R4 R5 R6 R7 R8 R9 R10 R11 R12 R13 R14 R15 R16 R17 R18 R19 R20 R21 R22 R23 R24 R25: library part Weerstand, Manufacturer="Vishay Dale", Part Number=CRCW08050000Z0EA
RE1: library part RELAY_GENERAL_PURPOSE, Ambient Temperature Range High=+85°C, Ambient Temperature Range Low=-40°C, Coil Power=403mW, Coil Resistance=62Ω, Coil Voltage=5V, Current Rating=8A, Manufacturer="TE Connectivity", Manufacturer Part Number=RT424005, Automotive=No, Category=Relay, Coil Type=Non-Latching, ComponentLink2Description=Datasheet, ComponentLink2URL=https://www.te.com/commerce/DocumentDelivery/DDEController?Action=showdoc&DocId=Data+Sheet%7FRT2%7F1014%7Fpdf%7FEnglish%7FENG_DS_RT2_1014.pdf%7F5-1393243-9, Device Class L1=Electromechanical, Device Class L2=Relays, Device Class L3="Power Relays", Digikey Description="RELAY GENERAL PURPOSE DPDT 8A 5V", Height=15.7mm, Lead Free=Yes, Mouser Description="General Purpose Relay, Rt2 Series, Power, Non Latching, Dpdt, 5 Vdc, 8 A Rohs Compliant: Yes", Number Of Contacts=2, Octopart=https://octopart.com/5-1393243-9-te+connectivity-41835766, Package=RT424005, RoHS=TRUE, Throw Configuration=DPDT
T1 T2 T4: library part Transistor_NPN, Manufacturer="On Semiconductor", PartNumber=BC547C, ComponentLink1Description="Manufacturer URL", ComponentLink1URL=http://www.onsemi.com/, ComponentLink2Description=Datasheet, ComponentLink2URL=http://www.onsemi.com/pub_link/Collateral/BC546-D.PDF, ComponentLink3Description="Package Specification", ComponentLink3URL=http://www.onsemi.cn/pub_link/Collateral/2N6426-D.PDF, DatasheetVersion="Rev. 7", fT Min (MHz)=150, IC Continuous (A)=0.1, Mounting Technology="Through Hole", PackageDescription="3-Pin Transistor Outline, Body 4.825 x 3.685 mm, Pitch 1.27 mm", PackageReference=TO-92-3-29-11_AM_SL, PackageVersion="Rev. AM", Packing="Bulk Box", Polarity=NPN, RoHS=FALSE
T3: library part MOSFET_P, Continuous Drain Current Id=2.4A, Current Temperature=25°C, Drain Source Voltage Vds=20V, Manufacturer="Fairchild Semiconductor", On Resistance Rds(on)=52mohm, Operating Temperature Max=150°C, Operating Temperature Min=-55°C, Operating Temperature Range=-55°Cto+150°C, Package / Case=SOT-23, Package Description="3-Pin Small Outline Transistor, Body 2.92 x 1.4 mm, Pitch 0.95 mm", Package Reference=SSOT3L, Package Version="Rev. 3, 05/2015", Power Dissipation Pd=500mW, Pulse Current Idm=10A, Rds(on) Test Voltage Vgs=-4.5V, Threshold Voltage Vgs Typ=-800mV, Voltage Vds Typ=-20V, Voltage Vgs th Max=-1.5V, Current Id Max=2.4A, Datasheet URL=https://www.fairchildsemi.com/datasheets/FD/FDN304P.pdf, Datasheet Version="Rev. C, 01/2001", External Depth=2.5mm, External Length / Height=1.12mm, External Width=3.05mm, Full Power Rating Temperature=25°C, Manufacturer URL=https://www.fairchildsemi.com/, Mounting Technology=SurfaceMount, No. of Pins=3, Package URL=https://www.fairchildsemi.com/package-drawings/MA/MA03B.pdf, Reel Quantity=3000, SMD Marking=304P, SVHC=NoSVHC(19-Dec-2012), Tape Width=8mm, Termination Type=SMD, Transistor Case Style=SOT-23, Transistor Polarity=PChannel, Voltage Vds=20V, Voltage Vgs Max=-800mV, Voltage Vgs Rds on Measurement=-4.5V
T5: library part Transistor_PNP, Manufacturer="On Semiconductor", PartNumber=BC557C, ComponentLink1Description="Manufacturer URL", ComponentLink1URL=http://www.onsemi.com/, ComponentLink2Description=Datasheet, ComponentLink2URL=http://www.onsemi.com/pub_link/Collateral/BC556B-D.PDF, ComponentLink3Description="Package Specification", ComponentLink3URL=http://www.onsemi.cn/pub_link/Collateral/2N6426-D.PDF, DatasheetVersion="Rev. 3", IC Continuous (A)=-0.1, Mounting Technology="Through Hole", PackageDescription="3-Pin Transistor Outline, Body 4.825 x 3.685 mm, Pitch 1.27 mm", PackageReference=TO-92-3-29-11_AM_SL, PackageVersion="Rev. AM", Packing="Bulk Box", Polarity=PNP, RoHS=FALSE

## Free pads (board coordinates)
  round 120 hole 120: 1(-210,3725) 2(-205,20) 3(5500,50) 4(3375,3730) 4(4185,3730) 4(5500,3725) 5(3375,35) 6(4185,45)
  round 60 hole 30: 7(1115,1925) 8(2265,1125) 9(1870,1780) 10(2320,1340) 13(2475,1430)

## Via types
v1: diameter 43.31, hole 23.62, Top Layer to Bottom Layer, 53 vias

## Nets (pads, with @x,y where several pads share a name; then routed paths per layer and width w, separated by ;. In a path a pad name is that pad's centre, name@x,y a point inside that pad or via, vN(x,y) a via of type N, cw(c..) or ccw(c..) an arc to the next point about the centre after c; other vN are vias at no path point)
+5V: ATMEGA4809.14 ATMEGA4809.42 C2.1 C3.2 C5.2 C8.1 C9.1 C10.2 C15.1 C16.1 C17.1 C18.1 C19.2 D1.1 D3.1 IC1.3 IC1d.16 IC2.4 K1d.1 k7.1 k11.2 K12.1 L1.2 R2.2 R16.1 R21.1 R22.1 R23.2 R24.2 R25.2 RE1.A1 | length 22699.9
  Top Layer w10: IC2.4@870,1930 870,2030.81 ; 2302.47,1873.69 2369.74,1806.42 2369.74,1784.03 2380,1773.78 ATMEGA4809.14@2380,1768.61 ; ATMEGA4809.14 2480.42,1768.58 ; 2619,1630 2654,1630 2694.16,1670.16 ATMEGA4809.42 2913.7,1670.16 ; 3214,1681.3 3256.75,1724.05 3256.75,1879.06 3282,1904.32 3282,1955.68 3278.25,1959.44 3278.25,2000.56 3282,2004.32 3282,2055.68 3278.25,2059.44 3278.25,2067.71 3230.09,2115.86 3230.09,2151.15 3245.85,2166.91 3268.15,2166.91 3317.51,2117.54 3317.51,1635.78 3281.85,1600.12 3281.85,1428.12 3246.19,1392.46 3024.08,1392.46 2938.05,1478.49 2938.05,1526.33 2941.13,1529.41 3050.27,1529.41 3072.96,1506.71 3211.29,1506.71 3217.15,1512.57 D3.1@3217.15,1531.46 ; C15.1 4925.18,2295.18 ; R25.2 5079.65,1591.65 5163,1675 IC1d.16 5337.5,1675 5352,1689.5 5352,2244 5339.29,2256.71 5325.18,2270.82 5325.18,2558.82
  Top Layer w15: -180,3394.37 D1.1@-5.89,3568.48 ; C5.2@-139.92,3221.81 C5.2 -154.46,3223.65 -154.46,3163.24 -145.67,3154.46 -105.54,3154.46
  Top Layer w20: C5.2@-180,3239.15 -180,3280 ; 938.11,1323.11 C3.2 ; 970,1080 R2.2 ; R16.1@1392.26,830 R16.1 ; 2050.18,889.62 2050.18,784.38 2051.6,716.41 2051.67,713.09 2058.26,646.7 C2.1 ; 2480.42,1768.58 2619,1630
  Top Layer w21.65: 4846,2689 4905,2630 4928,2630 4928,2631 ; v1(4940,2860) 4940,2748.57 4928,2736.57 4928,2631 ; C19.2 4929,2630 4928,2631
  Top Layer w21.74: C16.1 4720,1167.5 ; C17.1 v1(5120,1015) ; 5325.18,2270.82 C18.1 5339.29,2180 5339.29,2256.71 R23.2
  Top Layer w24.61: 4720,1167.5 4732.5,1180 R24.2 4761.07,1179.28 4833.52,1179.28 4850,1162.8 v1(4850,1045) ; v1(4955,1180) R25.2 ; 5292,2630 R23.2
  Top Layer w25: -180,3280 -180,3394.37 ; -105.54,3154.46 -30,3230 v1(-30,3280) ; v1(620,2080) 705.36,2080 720,2094.64 720,2129.21 ; 858.28,2042.53 870,2030.81 ; 938.11,1323.11 920,1305 k7.1 970,1080 ; v1(1330,952) 1392.26,889.74 R16.1@1392.26,830 ; R16.1 1581.3,830 1749.32,661.98 ; C9.1 C8.1 1770,680 1870,780 1968.77,780 2020.25,831.48 2020.25,859.69 2050.18,889.62 2055.58,895.02 2055.58,920.76 L1.2 ; 2270,3230 k11.2 ; C10.2 2890.06,3431.95 3106.18,3431.95 R22.1@3151.99,3386.14 ; 2913.7,1670.16 2924.83,1681.3 3214,1681.3 ; K12.1 3120,2980 3120,3354.15 R22.1@3151.99,3386.14 ; R22.1 3164.09,3399.29 3151.99,3387.19 R22.1@3151.99,3386.14 ; D3.1 3060.41,1544.37 3012.7,1592.09 2881.52,1592.09 2829.64,1540.21 2829.64,1494.64 3019.54,1304.75 3294.75,1304.75 3370,1380 R21.1 ; K1d.1 4170,2525 4334,2689 4846,2689 ; 5292,2630 v1(5207,2715) 5207,2677 5325.18,2558.82
  Top Layer w30: 4925.18,2295.18 v1(5055,2425)
  Top Layer w50: 2270,3230 2320,3180 ; 2302.47,2410.9 IC1.3
  Top Layer w70: RE1.A1 720,2129.21 858.28,2042.53 ; 2302.47,1873.69 2302.47,2410.9 ; 2320,3180 2320,2680 2370,2630 IC1.3
  Bottom Layer w10: v1(5055,2425) 5055,2703 5065,2713
  Bottom Layer w25: v1(-30,3280) 520,2730 ; v1(620,2080) 673.5,2026.5 673.5,1983.53 674.52,1982.52 674.52,1957.52 485.59,1768.59 485.59,1238.41 639,1085 875,1085 k7.1 1152,1130 v1(1330,952) ; 806.21,2817 1018,2817 1164,2671 1284,2671 1460.34,2847.34 1460.34,2854.71 1495.29,2889.66 1958.76,2889.66 IC1.3 2420,2528.43 2420,2780 2663,3023 3077,3023 K12.1 ; v1(4850,1045) 4951.5,1146.5 4951.5,1176.5 v1(4955,1180) v1(5120,1015) ; v1(4940,2860) 4944.95,2860 4983.81,2821.14 5000.84,2821.14 5016.99,2804.99 5016.99,2753.01 5055,2715 5065,2715 v1(5207,2715)
  Bottom Layer w50: 520,2730 520,2682.42 419.21,2581.63 RE1.A1 806.21,2817
GND: ATMEGA4809.15 ATMEGA4809.29 ATMEGA4809.43 B1.2 B2.2 C1.1 C2.2 C3.1 C4.1 C5.1 C6.2 C7.2 C8.2 C9.2 C10.1 C11.2 C18.2 C19.1 D2.2 ENC1.2 ENC1.C IC1.2 IC1d.1 IC2.8 K1d.10 K3.2 K6.4 k7.3 k10.3 k11.6 K12.10 L2.2 R6.1 R8.1 R9.1 R10.1 R20.1 T1.3 T4.3 T5.1 | length 29088.5
  Top Layer w10: C5.1 123.54,3230 140.2,3213.35 140.2,3074.66 185,3029.86 ; T1.3 357.4,3272.4 365,3280 ; 2120,1981.54 2352.64,1748.9 ATMEGA4809.15 ; v1(2470,1360) 2470,1365 2540.47,1435.47 ATMEGA4809.29 ; ATMEGA4809.43 2886.11,1689.84 ; 4730,2425.86 4735.86,2420 ; C19.1@4730,2613.35 4746.65,2630 4786.77,2630 4803.42,2613.35 4803.42,2601.58 4834.49,2570.51 ; 5019.57,2167.5 5032.07,2180 ; 5090,2540 5125,2575 ; 5174.14,2500 5180,2494.14 ; 5180,2274.95 5270,2184.95 C18.2
  Top Layer w15: 357.4,3117.4 T1.3 ; 685,1765 IC2.8 ; T4.3 1120,704 ; 1157.4,306.6 T5.1 1223,369.37 ; 1692.41,1907.59 1742.41,1907.59
  Top Layer w15.75: 1020,549 1090.37,619.37 T4.3
  Top Layer w20: 88.11,2901.11 C5.1@88.11,3220.85 ; R10.1 420,3630 ; 555.63,3606.16 555.63,3630 ; 701.89,1323.11 C3.1 701.89,1748.11 ; 1020,830 R20.1 1079.65,744.35 ; C4.1 1229.65,3307.76 ; 1229.65,3480 R6.1 ; 1262.37,330 R9.1 R8.1 ; C7.2 1530.92,1891.74 1530.92,1892.43 1558.52,1923.85 1564.31,1929.63 1629.62,1933.85 1638.55,1933.85 1670,1902.4 C6.2 ; 1900.18,961.98 1900.18,969.45 ; C10.1@2609.01,3441.65 2620.66,3430 2651,3430 C10.1 ; IC1d.1 5019.57,2167.5
  Top Layer w21.65: C10.1@2640.17,3440.83 C10.1@2651,3430
  Top Layer w21.74: C7.2@1535.82,1881.05 C7.2@1536.3,1881.05
  Top Layer w25: -180,2440.36 -165.36,2455 B1.2 ; -60,1610 241,1610 371,1480 371,1370 561,1180 ; 220,3730 220,3530 270,3480 270,3130 309.64,3090.36 330.36,3090.36 357.4,3117.4 ; L2.2 561,1180 ; 455.36,3730 470,3715.36 470,3680 420,3630 470,3630 ; 555.63,3630 470,3630 ; 620,3780 470,3630 ; 685,1765 701.89,1748.11 ; 701.89,1323.11 720,1305 k7.3 ; 1020,549 1020,135.64 1034.64,121 1208,121 1208,256 1157.4,306.6 ; 1020,830 k7.3 ; 1079.65,744.35 1120,704 ; 1223,369.37 1262.37,330 ; 1229.65,3307.76 1229.65,3480 1355.36,3480 1370,3494.64 1370,3530 1375,3535 1420,3580 ; R8.1 1329.65,585.91 1373.74,630 1537.2,630 ; 1742.41,1907.59 1820,1830 1920,1830 1970,1780 1970,1030 1909.45,969.45 1900.18,969.45 1886.67,969.45 ; B2.2 1770,3609 1795,3584 2216,3584 k11.6 2170,3430 ; 1820,965.36 1824.09,969.45 ; C11.2 C11.2@1900.16,948.8 ; 1994.75,2106.79 2120,1981.54 ; C2.2 C9.2 1892.41,544.64 1877.77,530 1734.64,530 1720,544.64 1720,624.82 C8.2 1537.2,630 ; 2155.36,2730 2170,2744.64 ; 2520,3480 2597.29,3480 2609.01,3468.28 C10.1@2609.01,3441.65 ; C10.1 2714,3367.89 2714,2850.86 2728.64,2836.22 2763.78,2836.22 K12.10 ; 2886.11,1689.84 3175,1978.73 3175,1985 k10.3 ; ENC1.2 4820,3160 4888,3092 5001.69,3092 ENC1.C ; 561,1180 611,1130 k7.3 ; 1537.2,630 1367.01,800.19 1367.01,865.79 1295.59,937.21 1295.59,966.25 1315.75,986.41 1388.88,986.41 1403.59,971.69 1403.59,958.75 1423.75,938.59 1667.37,938.59 1698.23,969.45 1824.09,969.45 ; 1824.09,969.45 1886.67,969.45 ; 1886.67,969.45 1894.14,961.98 1894.14,955.63 C11.2@1900.16,948.8 ; C11.2@1900.17,948.8 ccw(c1918.91,965.34) C11.2@1905.57,944.2 ; C11.2@1900.17,948.8 ccw(c1918.91,965.34) C11.2@1905.57,944.2 ; C11.2@1900.16,948.8 ccw(c1918.91,965.34) C11.2@1905.57,944.2 ; C11.2@1900.17,948.8 ccw(c1918.91,965.34) C11.2@1905.57,944.2
  Top Layer w30: 185,3029.86 185,2645 440,2645 715,2920 715,3210 645,3280 365,3280 ; K1d.10 4475,1875 IC1d.1 ; 4730,2425.86 C19.1@4730,2613.35 ; 4735.86,2420 4970,2420 5050,2500 5174.14,2500 ; 4834.49,2570.51 4865,2540 5090,2540 ; 5032.07,2180 C18.2 ; ENC1.C 5044.41,2828.64 5125,2748.05 5125,2575 ; 5180,2274.95 5180,2494.14
  Top Layer w40: B1.2 -30,2783
  Top Layer w50: -180,2440.36 -180,1730 -60,1610 ; -30,2783 88.11,2901.11 ; 220,3730 455.36,3730 ; K3.2 712.52,619.37 1090.37,619.37 ; 1270,3780 1420,3630 1420,3580 ; 1375,3535 1425,3535 1693,3803 1997,3803 2216,3584 ; 1994.75,2106.79 1994.75,2690.46 2034.29,2730 2155.36,2730 ; 2170,2744.64 2170,3430 ; k11.6 2420,3677 2520,3577 2520,3480 ; C1.1 3070,436.3
  Top Layer w70: 620,3780 1270,3780 ; 3070,436.3 K6.4
  Bottom Layer w25: v1(2470,1360) 2541,1289 3011,1289 K6.4 3265,1425 3265,1985 k10.3 2870,2380 IC1.2 2770,2780 K12.10
NetATMEGA4809_1: ATMEGA4809.1 K12.5 | length 1258.7
  Top Layer w10: ATMEGA4809.1 ATMEGA4809.1@2678.27,1869.97 ; ATMEGA4809.1@2678.3,1870 2689.11,1870 2695,1875.89
  Top Layer w25: 2695,2586.59 2820.41,2712 2820.41,2855.41 2845,2880 2920,2880 K12.5
  Top Layer w30: 2695,1875.89 2695,2586.59
NetATMEGA4809_2: ATMEGA4809.2 K12.7 | length 1566.1
  Top Layer w10: ATMEGA4809.2 2658.58,1814.87 2668.87,1804.58 2685.41,1804.58 2689.26,1808.43 2689.26,1838.91 2783.37,1933.02 2823.02,1933.02 2925.75,2035.75
  Top Layer w25: K12.7 2915,2975 3014.25,2975 3014.25,2911.67 2977.58,2875 2952.42,2875 2925.75,2848.33 2925.75,2035.75
NetATMEGA4809_3: ATMEGA4809.3 K12.9 | length 1156.4
  Top Layer w10: ATMEGA4809.3@2638.87,1870 2633.7,1870 2625,1878.7 2625,2776.39 2638.9,2790.28 v1(2638.9,2798.9) ; ATMEGA4809.3 ATMEGA4809.3@2638.9,1869.97
  Bottom Layer w25: v1(2638.9,2798.9) K12.9
NetATMEGA4809_11: ATMEGA4809.11 k7.2 R16.2 | length 3029.4
  Top Layer w10: v1(2405,1975) 2481.42,1898.58 ATMEGA4809.11
  Top Layer w20: 1295.25,901.75 1329.65,867.35 R16.2
  Top Layer w25: 1295.25,901.75 1270.34,926.66 1270.34,976.71 1305.29,1011.66 1334.46,1011.66 1368,1045.2 v1(1368,1186)
  Bottom Layer w25: k7.2 876,1186 ; v1(1368,1186) 876,1186 ; v1(2405,1975) 1665,1975 876,1186
NetATMEGA4809_16: ATMEGA4809.16 K5.1 | length 500
  Top Layer w10: 2333.79,1729.21 ATMEGA4809.16
  Top Layer w25: v1(2220,1830) 2320.79,1729.21 2333.79,1729.21
  Bottom Layer w25: K5.1 2170,1880 v1(2220,1830)
NetATMEGA4809_17: ATMEGA4809.17 K5.2 | length 938.2
  Top Layer w10: 2243.47,1709.53 ATMEGA4809.17
  Top Layer w25: v1(2211.35,1719.78) 2214.85,1716.28 2236.72,1716.28 2243.47,1709.53
  Bottom Layer w25: K5.2 1756.33,1880 1741.68,1865.36 1741.68,1744.64 1756.32,1730 1953.01,1730 1956.23,1733.22 1969.67,1719.78 v1(2211.35,1719.78)
NetATMEGA4809_23: ATMEGA4809.23 K9.1 pad.8 | length 1266.6
  Top Layer w10: 2318,1591.42 ATMEGA4809.23
  Top Layer w25: pad.8@2248.87,1130 2253.83,1130 2253.83,1527.25 2318,1591.42
  Bottom Layer w25: K9.1 1669.18,1179.18 1669.18,1158.47 1683.82,1143.82 2235.05,1143.82 pad.8@2248.87,1130
NetATMEGA4809_24: ATMEGA4809.24 K9.2 | length 778.6
  Top Layer w10: 2318,1527.41 2362.32,1571.73 ATMEGA4809.24
  Top Layer w25: v1(2295,1500) 2295,1504.41 2318,1527.41
  Bottom Layer w25: K9.2 1820,1310.11 2009.89,1500 v1(2295,1500)
NetATMEGA4809_25: ATMEGA4809.25 K9.3 pad.10 | length 756.2
  Top Layer w10: pad.10@2322.5,1337.5 2461.73,1476.73 ATMEGA4809.25
  Bottom Layer w25: K9.3 1920,1240.28 1897.99,1262.29 1897.99,1310.97 1912.64,1325.61 pad.10
NetATMEGA4809_26: ATMEGA4809.26 K9.4 | length 936.9
  Top Layer w10: v1(2355,1430) 2359.08,1434.08 2359.08,1466.65 2447.84,1555.42 2467.46,1555.42 2476.73,1546.14 2479.12,1546.14 2481.42,1543.85 ATMEGA4809.26
  Bottom Layer w25: K9.4 2020,1185.75 2406.78,1185.75 2414.25,1193.22 2414.25,1295.34 2410.34,1299.26 2410.34,1384 2392.66,1401.68 2388.27,1401.68 2359.95,1430 v1(2355,1430)
NetATMEGA4809_27: ATMEGA4809.27 K9.5 | length 685.9
  Top Layer w10: v1(2295,1410) 2299.6,1414.6 2299.6,1446.65 2413.12,1560.17 2438.09,1560.17 2443.59,1565.67 2475.4,1565.67 2495.91,1545.16 ATMEGA4809.27@2501.07,1545.16
  Bottom Layer w25: K9.5 2337.71,1297.25 2362.75,1322.29 2362.75,1357.71 2337.71,1382.75 2327.2,1382.75 2299.95,1410 v1(2295,1410)
NetATMEGA4809_28: ATMEGA4809.28 C11.1 L1.1 pad.13 | length 1416.3
  Top Layer w10: pad.13 2520.79,1475.79 ATMEGA4809.28
  Top Layer w20: 1845,841.94 1845,912.99 1847.36,915.36 1847.9,915.36 C11.1 ; 1995,841.94 1995,912.99 1997.36,915.36 1997.9,915.36 L1.1 1997.9,944.64 1997.36,944.64 1995,947.01 1995,997.36 v1(2009.64,1012)
  Top Layer w25: 1845,841.94 1857.73,829.2 1982.26,829.2 1995,841.94
  Bottom Layer w25: v1(2009.64,1012) 2325,1012 2514.25,1201.25 2514.25,1255.59 2435.59,1334.25 2435.59,1390.92 pad.13@2480,1435.33
NetATMEGA4809_31: ATMEGA4809.31 K4.1 | length 393.9
  Top Layer w10: 2579.84,1439.84 ATMEGA4809.31
  Top Layer w25: K4.1 2437.75,1297.75 2470.91,1297.75 2579.84,1406.68 2579.84,1439.84
NetATMEGA4809_32: ATMEGA4809.32 K4.2 | length 341.2
  Top Layer w10: 2599.53,1359.53 ATMEGA4809.32
  Top Layer w25: K4.2 2599.53,1359.53
NetATMEGA4809_33: ATMEGA4809.33 K4.3 | length 308
  Top Layer w10: 2619.21,1279.21 ATMEGA4809.33
  Top Layer w25: K4.3 2619.21,1279.21
NetATMEGA4809_34: ATMEGA4809.34 K6.1 | length 341.9
  Top Layer w10: 2638.9,1361.1 ATMEGA4809.34
  Top Layer w25: 2638.9,1361.1 K6.1
NetATMEGA4809_35: ATMEGA4809.35 K6.2 | length 375.2
  Top Layer w10: 2658.58,1441.42 ATMEGA4809.35
  Top Layer w25: 2658.58,1441.42 K6.2
NetATMEGA4809_39: ATMEGA4809.39 k11.4 | length 2529.6
  Top Layer w10: ATMEGA4809.39 2788.9,1611.1 v1(2817,1583)
  Top Layer w25: v1(2224,1934) 2070,2088 2070,2630 2120,2680 2209.36,2680 2224,2694.64 2224,3384 k11.4
  Bottom Layer w25: v1(2224,1934) 2466,1934 v1(2817,1583)
NetATMEGA4809_40: ATMEGA4809.40 C14.1 D3.2 | length 1007
  Top Layer w10: ATMEGA4809.40 2999.1,1630.79 3032.27,1597.62 3216.11,1597.62 3249.27,1564.46 3249.27,1523.67 3187.88,1462.28 3187.88,1421.49 3193.74,1415.63 ; 3134.37,1415.63 3193.74,1415.63 ; D3.2 3193.74,1415.63
  Top Layer w20: C14.1 3047.59,1502.41 3134.37,1415.63
NetATMEGA4809_41: ATMEGA4809.41 k11.5 | length 3256.3
  Top Layer w10: ATMEGA4809.41 3004.53,1650.47
  Top Layer w25: 3004.53,1650.47 3025,1630 3281.36,1630 3296,1644.64 3296,1893.21 3299.76,1896.96 3299.76,1963.04 3296,1966.79 3296,1993.21 3299.76,1996.96 3299.76,2063.04 3296,2066.79 3296,2101 v1(3257,2140)
  Bottom Layer w25: k11.5 2324,3484 2324,3290 2557,3057 3180,3057 3257,2980 v1(3257,2140)
NetATMEGA4809_44: ATMEGA4809.44 k10.1 | length 964.6
  Top Layer w10: ATMEGA4809.44 2870,1709.53
  Top Layer w25: 2870,1709.53 2944.2,1783.72 2944.2,1827.72 3191.47,2075 3245.85,2075 3260.49,2060.36 3260.49,2052.09 3264.25,2048.33 3264.25,2011.67 3260.49,2007.91 3260.49,1952.09 3264.25,1948.33 3264.25,1911.67 3239,1886.42 3239,1849 k10.1
NetATMEGA4809_45: ATMEGA4809.45 k10.2 | length 570.7
  Top Layer w10: ATMEGA4809.45 2818,1729.21
  Top Layer w25: 2818,1729.21 v1(2859.79,1771)
  Bottom Layer w25: v1(2859.79,1771) 3018.79,1930 k10.2
NetATMEGA4809_46: ATMEGA4809.46 K12.2 R21.2 | length 2231
  Top Layer w10: ATMEGA4809.46 2788.9,1748.9 3216,2176
  Top Layer w20: R21.2 3370,2135.23
  Top Layer w25: K12.2 3370,2630 3370,2135.23 3320.57,2184.66 3224.66,2184.66 3216,2176
NetATMEGA4809_47: ATMEGA4809.47 K12.4 R22.2 | length 2111.2
  Top Layer w10: ATMEGA4809.47 2684.35,1768.58 2681.44,1771.49 2681.44,1780 2688.72,1780 2694.58,1785.86 2694.58,1792.5 2700.57,1798.49 2707.22,1798.49 2738.72,1830 2770,1830 2970,2030
  Top Layer w24.61: 3214,3480 3215,3479
  Top Layer w25: 2970,2030 v1(2970,2730) ; K12.4 3115,2875 3215,2875 3215,3479 ; R22.2 3214,3480
  Bottom Layer w25: v1(2970,2730) K12.4
NetATMEGA4809_48: ATMEGA4809.48 K12.3 | length 1308
  Top Layer w10: ATMEGA4809.48 2777.51,1788.27 3015.7,2026.47
  Top Layer w25: 3015.7,2026.47 3015.7,2875.7 K12.3
NetB1_3: B1.3 B2.4 K1.2 RE1.11 | length 2776.8
  Top Layer w25: B1.3 v1(-30,2210) ; RE1.11 RE1.11@1224.53,2430 ; 1261.91,2392.62 1282.62,2392.62 ; 1870,2980 K1.2 1970,3148.15 B2.4
  Top Layer w50: RE1.11@1224.53,2430 1261.91,2392.62 ; 1282.62,2392.62 1870,2980
  Bottom Layer w25: 1146.42,2358 RE1.11
  Bottom Layer w45: v1(-30,2210) 118,2358
  Bottom Layer w50: 118,2358 1146.42,2358
NetB1_4: B1.4 K2.2 RE1.22 | length 2370.4
  Top Layer w25: B1.4 v1(170,2230)
  Bottom Layer w25: 1515.28,2230 K2.2
  Bottom Layer w50: v1(170,2230) 1515.28,2230 RE1.22
NetB2_1: B2.1 C4.2 IC1.1 | length 2624.9
  Top Layer w20: 1388,3398 1388,3230 C4.2
  Top Layer w25: 1388,3398 1709,3719 1806,3719 1870,3655 B2.1 ; C4.2 1423.54,3230 1520,3133.54
  Top Layer w70: v1(1520,2830) 1520,3133.54
  Bottom Layer w25: v1(1520,2830) 1520,2555 1797.36,2277.64 IC1.1
NetB2_3: B2.3 K1.1 RE1.21 | length 987.1
  Top Layer w25: K1.1 B2.3
  Bottom Layer w50: RE1.21 1473.15,2980 K1.1
NetC7_1: C7.1 IC2.2 IC2.3 R1.2 R4.1 R8.2 | length 4888.6
  Top Layer w10: IC2.3 900.03,1895 1035.03,2030
  Top Layer w15: IC2.2 IC2.3 ; R4.1 1420,189.65 1420,230
  Top Layer w20: 1320,1907.97 R1.2 1397,1870.35 ; 1410.35,475.65 R8.2 ; 1442.53,1824.82 C7.1
  Top Layer w25: 1035.03,2030 1270,2030 1320,1980 ; 1319.99,1907.99 1345,1933 1367,1933 1320,1980 ; 1397,1870.35 1442.53,1824.82 ; 1410.35,475.65 1470,416 1470,280 1420,230 ; 2074.35,722.6 2270,389.48 ; 2074.35,722.63 2074.13,748.75 2072.93,784.76 2072.93,876.66 2086.82,890.55 2091.85,890.55 2099.32,898.02 2099.32,961.98 2091.85,969.45 2079.46,969.45 2064.82,984.1 2074.1,984.1 2120,1030 2120,1130 2070,1180 2070,1877 1967,1980 1320,1980
  Top Layer w50: R4.1 2270,180 2270,389.48
NetC12_2: C12.2 C13.2 R15.1 | length 460.5
  Top Layer w20: C13.2 475.18,1760.18 C12.2 ; 495,1630 520,1605 R15.1
NetC13_1: C13.1 IC2.5 IC2.6 R12.2 R13.1 R15.2 | length 2641.9
  Top Layer w15: 585,1925 IC2.5 ; 630,1895 IC2.6 ; R13.1@1620,1580 R13.1
  Top Layer w20: 385,1767.82 370,1752.82 370,1674.82 398.12,1646.7 403.08,1646.7 414.82,1634.95 C13.1 414.82,1541.47 ; R15.2 439.29,1517 ; R12.2 1129.65,1633.65 ; 1570,1580 R13.1@1620,1580
  Top Layer w25: 385,1767.82 385,1920 580,1920 ; 414.82,1541.47 439.29,1517 ; v1(520,1730) 630,1840 630,1895 605,1895 580,1920 ; 585,1925 580,1920 ; 1129.65,1633.65 1176,1680 ; v1(1203,1707) 1176,1680 ; 1570,1580 1470,1680 1203,1680 1176,1680
  Bottom Layer w25: v1(520,1730) 621,1831 1177,1831 1203,1805 v1(1203,1707)
NetC14_2: C14.2 k11.3 | length 3919.6
  Top Layer w20: 2882.74,1557.59 C14.2
  Top Layer w25: 2882.74,1557.59 2870,1544.85 2870,1490 3030,1330 3216,1330 3320,1434 3320,1465.36 3334.64,1480 3455.36,1480 3470,1494.64 ; v1(3421,3430) 3470,3381
  Top Layer w50: 3470,1494.64 3470,3381
  Bottom Layer w25: k11.3 v1(3421,3430)
NetC15_2: C15.2 ENC1.A K1d.5 R23.1 | length 2334.8
  Top Layer w21.74: 4605,2180 C15.2 v1(4870,2240)
  Top Layer w24.61: v1(5420,2392) R23.1 5420,2857.56
  Top Layer w25: K1d.5 4170,2278.29 4224.04,2224.25 4288.33,2224.25 4407.33,2105.25 4530.25,2105.25 4605,2180 ; ENC1.A 5420,2857.56
  Bottom Layer w25: v1(4870,2240) 5268,2240 v1(5420,2392)
NetC16_2: C16.2 ENC1.B K1d.7 R24.1 | length 3024
  Top Layer w21.74: C16.2 4664.82,973.17
  Top Layer w24.61: 4679.65,988 R24.1 4679.65,1247.35
  Top Layer w25: K1d.7 4125,2135 4125,1802 4679.65,1247.35 ; 4664.82,973.17 4679.65,988
  Bottom Layer w25: K1d.7 4215,2225 4545,2225 4562,2242 4562,2750.74 ENC1.B
NetC17_2: C17.2 ENC1.1 R25.1 | length 3450.5
  Top Layer w21.74: C17.2 5460,880
  Top Layer w24.61: R25.1 5160.35,1223 5161.35,1224 5420,1224 ; 5394.94,2717 5395.14,2716.8 5395.14,2678.02 5382.84,2665.71 5382.84,2380.78 5420,2343.62 5420,1224 ; 5493.14,1221.14 5422.86,1221.14 5420,1224